# Altium PCB PCB_Ledtraitim.PcbDoc
Units mil, origin at the board's own origin, x right, y up, seen from the top; angles counter-clockwise.
Board outline 3833.96 x 3178.97 mil, 2 copper layers (Top Layer, Bottom Layer); 44 components, 43 nets, 125 pads, 12 vias.
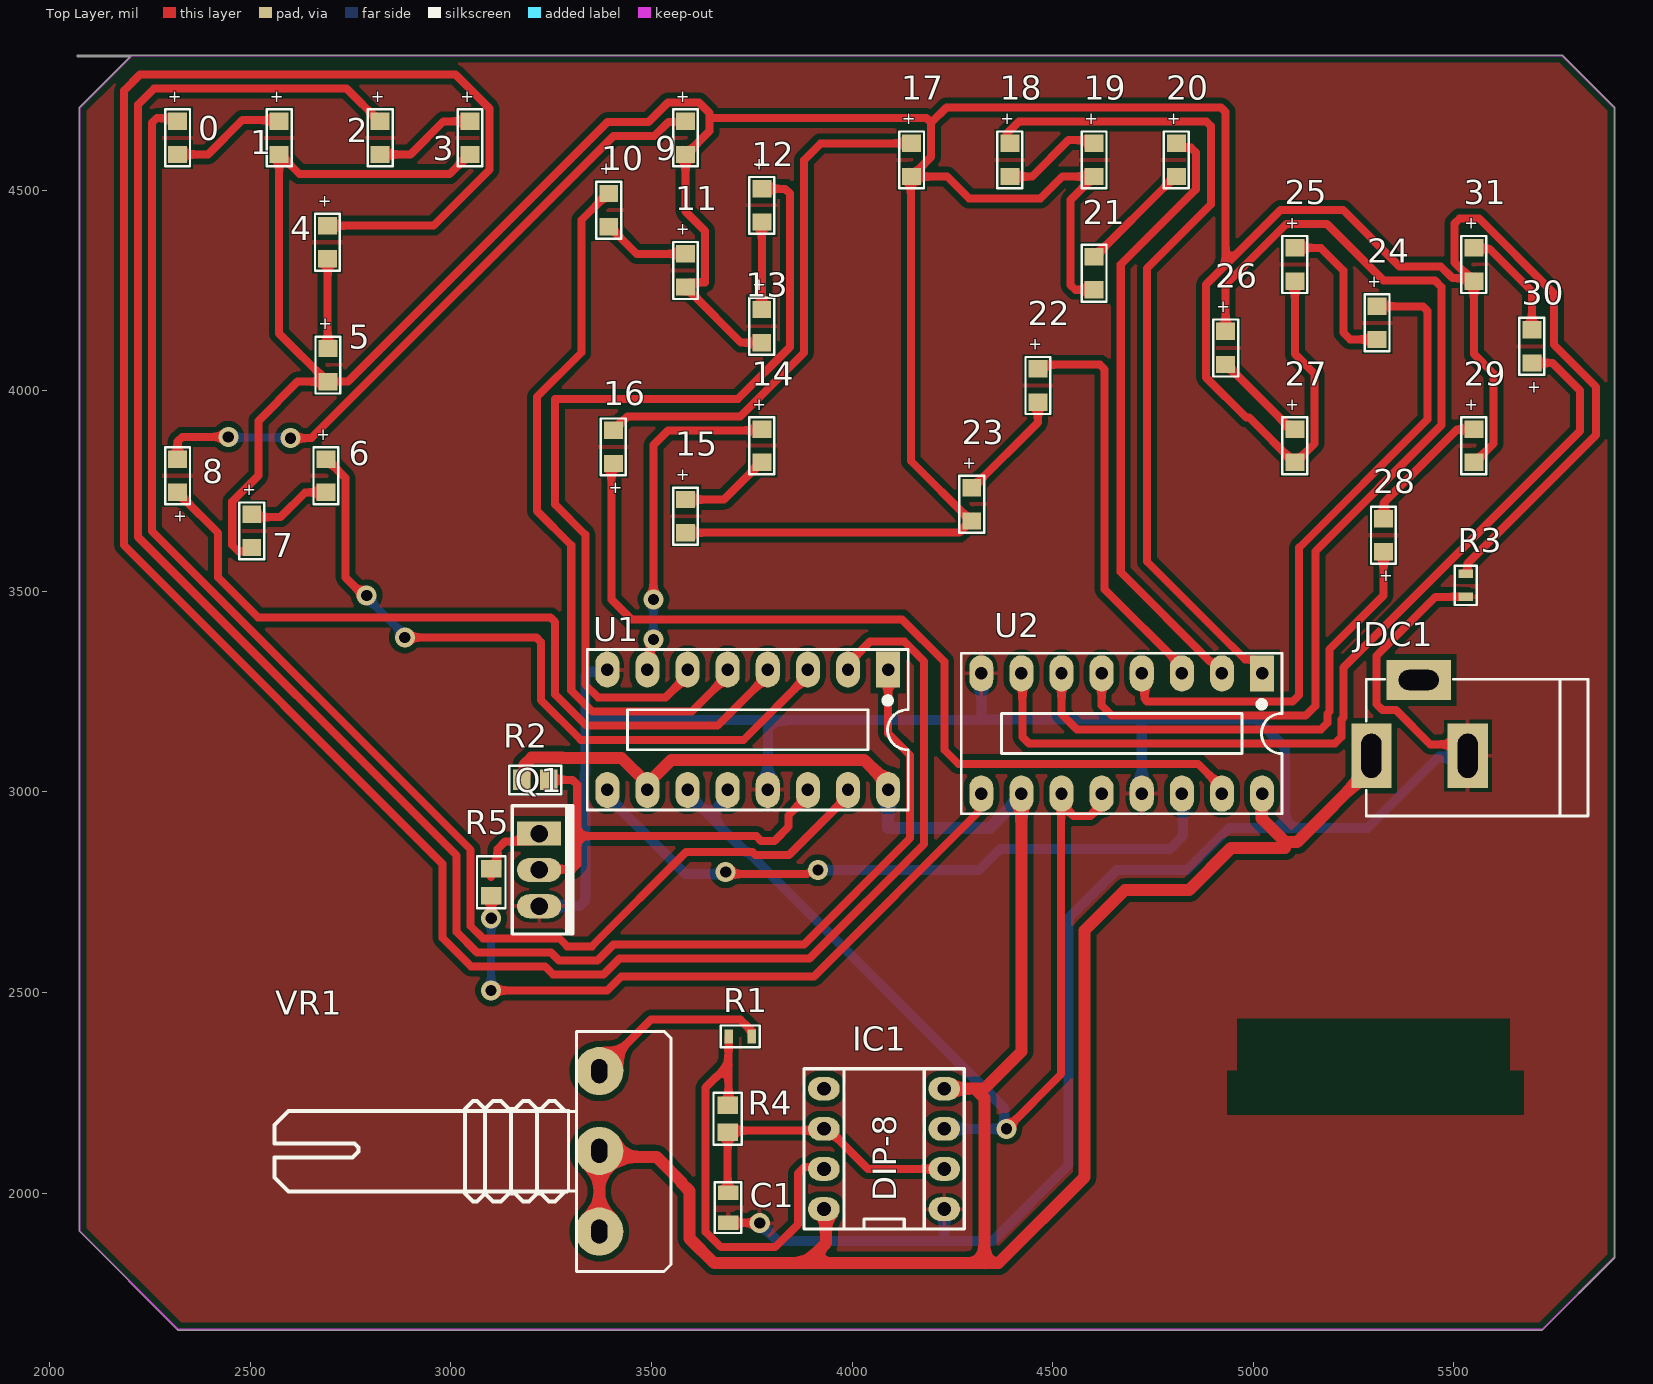
[diagram p0: Top Layer view]
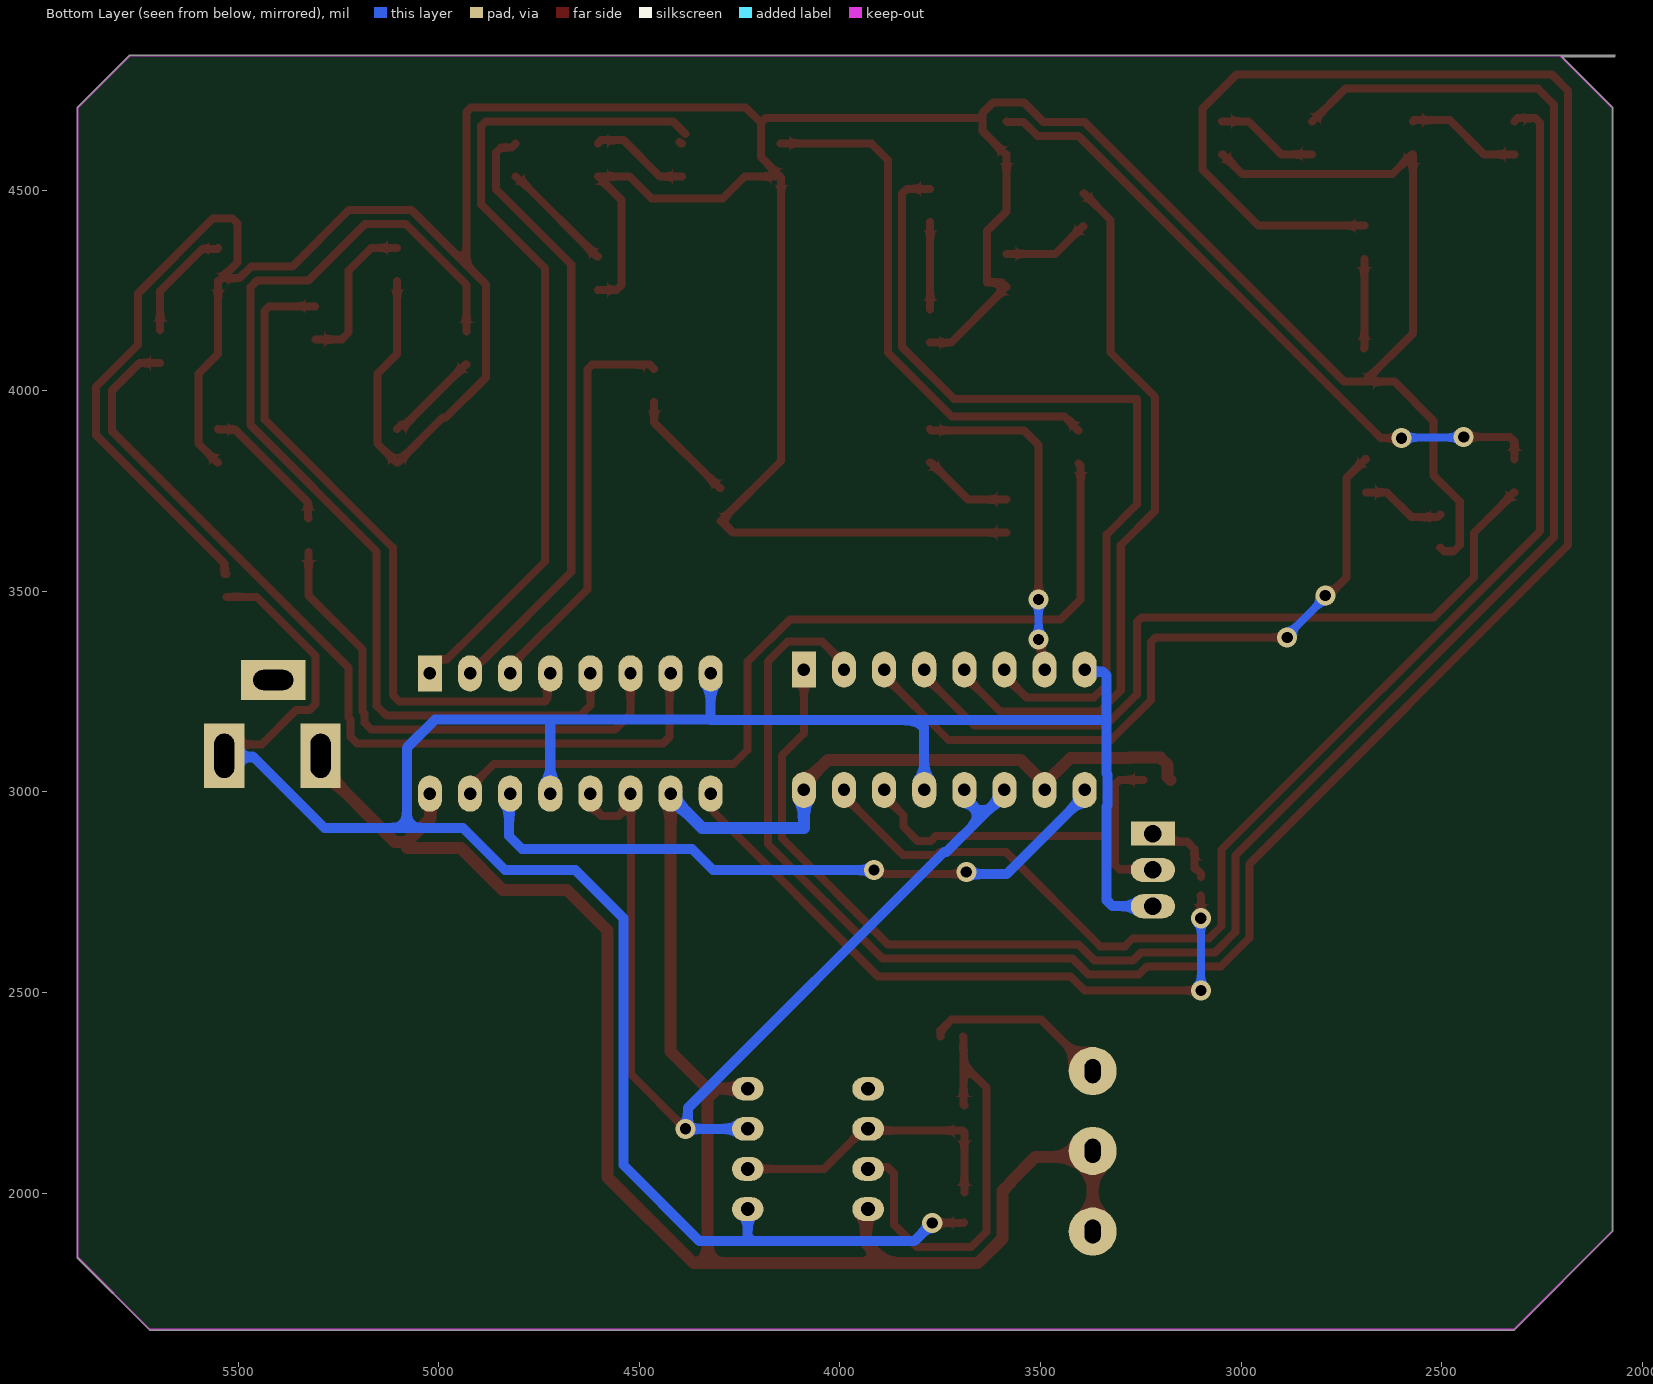
[diagram p1: Bottom Layer view, seen from below]
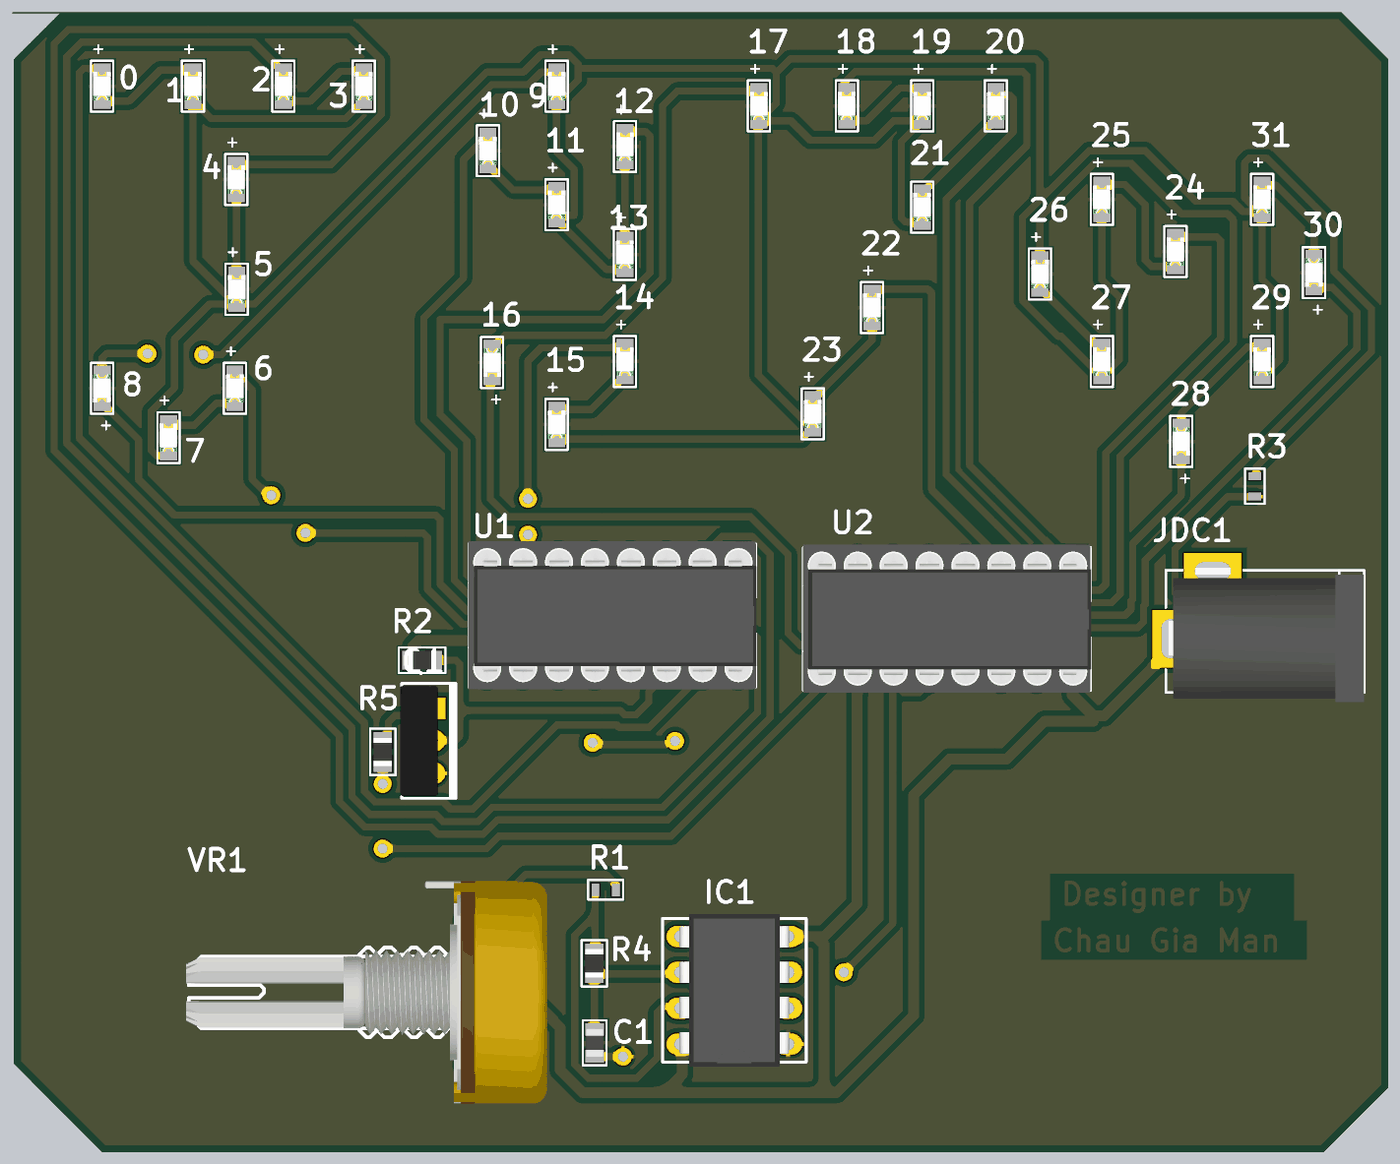
[diagram p2: 3D render of the assembled board from above, using the file's embedded part models]

## Layer stack, top to bottom
Top Solder: solder mask 0.4, Solder Resist, Dk 3.5
Top Layer: signal copper 1.4
Dielectric 1: dielectric 12.6, FR-4, Dk 4.8
Bottom Layer: signal copper 1.4
Bottom Solder: solder mask 0.4, Solder Resist, Dk 3.5

## Board outline
2073.02,1905 2073.02,4705 2073.6,4706.4 2200.21,4833.02 2070,4833.02 cw(c2070,4835) 2070,4836.98 5770,4836.98 5771.4,4836.4 5901.4,4706.4 5901.98,4705 5901.98,1840 5901.4,1838.6 5721.4,1658.6 5720,1658.02 2320,1658.02 2318.6,1658.6

## Design rules (kind name [scope] priority, off if disabled: settings)
Clearance [All] p1: gap=15 ignorepadtopadclearanceinfootprint=FALSE except(0: Arc-Hole Track-Hole SMDPad-Hole THPad-Hole Via-Hole Fill-Hole Poly-Hole Region-Hole Text-Hole)
PlaneConnect [All] p1: planeconnectstyle=Direct reliefexpansion=20 reliefentries=4 reliefconductorwidth=10 reliefairgap=10
PolygonConnect [All] p1: connectstyle=Relief reliefconductorwidth=10 reliefentries=4 polygonreliefangle="90 Angle" airgapwidth=10
RoutingVias [All] p1: holewidth=31.5 width=59.06 viastyle="Through Hole" minholewidth=31.5 minwidth=59.06 maxholewidth=31.5 maxwidth=59.06
SolderMaskExpansion [All] p1: expansion=4 istentingtop=FALSE
Width [All] p1: maxlimit=50 minlimit=20 preferedwidth=30 minimp=50.000000 maximp=50.000000 favimp=50.000000
29 further rules are at their usual default settings.

## Components (designator, comment, footprint, x,y, rotation, side; value= is the part's Value field where it differs from the comment)
0 "Red, 2V" WL-SMCW_0805 2318.46,4630.55 r90 top
1 "Red, 2V" WL-SMCW_0805 2571.74,4630.55 r90 top
2 "Red, 2V" WL-SMCW_0805 2823.52,4630.55 r90 top
3 "Red, 2V" WL-SMCW_0805 3047.59,4630.55 r90 top
4 "Red, 2V" WL-SMCW_0805 2692.25,4370.24 r90 top
5 "Red, 2V" WL-SMCW_0805 2693.46,4064.21 r90 top
6 "Red, 2V" WL-SMCW_0805 2688.46,3788.04 r90 top
7 "Red, 2V" WL-SMCW_0805 2503.46,3650.55 r90 top
8 "Red, 2V" WL-SMCW_0805 2318.46,3788.04 r270 top
9 "Red, 2V" WL-SMCW_0805 3584.89,4630.55 r90 top
10 "Red, 2V" WL-SMCW_0805 3393.46,4450.55 r90 top
11 "Red, 2V" WL-SMCW_0805 3584.89,4299.99 r90 top
12 "Red, 2V" WL-SMCW_0805 3775.23,4462.12 r90 top
13 "Red, 2V" WL-SMCW_0805 3775,4161.34 r90 top
14 "Red, 2V" WL-SMCW_0805 3775.23,3862.89 r90 top
15 "Red, 2V" WL-SMCW_0805 3584.89,3687.63 r90 top
16 "Red, 2V" WL-SMCW_0805 3405,3860 r270 top
17 "Red, 2V" WL-SMCW_0805 4148.46,4575.55 r90 top
18 "Red, 2V" WL-SMCW_0805 4393.46,4575.55 r90 top
19 "Red, 2V" WL-SMCW_0805 4603.46,4575.55 r90 top
20 "Red, 2V" WL-SMCW_0805 4808.55,4575.55 r90 top
21 "Red, 2V" WL-SMCW_0805 4603.46,4293.23 r90 top
22 "Red, 2V" WL-SMCW_0805 4463.46,4013.23 r90 top
23 "Red, 2V" WL-SMCW_0805 4298.46,3716.89 r90 top
24 "Red, 2V" WL-SMCW_0805 5309.05,4169.28 r90 top
25 "Red, 2V" WL-SMCW_0805 5104.05,4314.9 r90 top
26 "Red, 2V" WL-SMCW_0805 4931.52,4106.77 r90 top
27 "Red, 2V" WL-SMCW_0805 5104.05,3862.89 r90 top
28 "Red, 2V" WL-SMCW_0805 5325,3640 r270 top
29 "Red, 2V" WL-SMCW_0805 5550.37,3862.89 r90 top
30 "Red, 2V" WL-SMCW_0805 5694.94,4110.7 r270 top
31 "Red, 2V" WL-SMCW_0805 5550.37,4314.9 r90 top
C1 "10 uF, 25 VDC" CAP_0805 3690,1964.4 r90 top
IC1 "LM555" DIP8 4080,2110 r90 top
JDC1 "Jac DC" DC-IN 5535,3090 r180 top
Q1 "C1815" TO126 3220,2805.55 r270 top
R1 "1 KOhm, 1/4 W" resistor_0603 3721.46,2390 r0 top
R2 "1 MOhm, 1/8 W" RESISTOR_0805 3210,3030 r180 top
R3 "330 Ohm, 1/4 W" resistor_0603 5530,3515 r270 top
R4 "10 KOhm, 1/8 W" RESISTOR_0805 3690,2185 r90 top
R5 "1 MOhm, 1/8 W" RESISTOR_0805 3100.56,2774.57 r90 top
U1 "74HC595" DIP16 4090,3305 r180 top
U2 "74HC595" DIP16 5022.32,3295.56 r180 top
VR1 "10K" VOL_1 3370,2304 r270 top value="VR 10K"

## Footprints (in the part's own frame and the unit in brackets; to place one, negate y for a bottom-side part, rotate by r counter-clockwise, add the part's x,y. Pads: shape width x height; smd on the part's side, far side on the other; paste and mask are expansions set on the pad)
CAP_0805 [mm]
  rect 0.9x1.3 smd: 1(-0.975,-0.025) 2(0.925,-0.025)
  silkscreen extent -1.63,-0.86 1.57,0.81, body extent -1.03,-0.65 0.97,0.6, height 0.6
DC-IN [mil] "Jac DC input"
  rect 100x160 hole 50 slot 110.24 at 90 deg: 1(240.16,0) 2(0,0)
  rect 160x100 hole 50 slot 100 at 0 deg: 3(122.05,-188.98)
  silkscreen extent -300,-191 253,150, body extent -299,-198 245,176, height 434
DIP8 [mm] "W.300/L.400"
  oval 1.5x2 hole 0.864: 1(-3.81,-3.81) 1(1.27,-3.81) 2(-1.27,-3.81) 4(3.81,-3.81) 5(3.81,3.81) 6(1.27,3.81) 7(-1.27,3.81) 8(-3.81,3.81)
  silkscreen extent -5.08,-5.08 5.08,5.08, body extent -5.4,-3.88 5.4,3.88, height 4.5
DIP16 [mil] "16 PIN, W 300mil, Pin to pin 100mil"
  rect 60x90 hole 31: 1(0,0)
  oval 60x90 hole 31: 2(100,0) 3(200,0) 4(300,0) 5(400,0) 6(500,0) 7(600,0) 8(700,0) 9(700,300) 10(600,300) 11(500,300) 12(400,300) 13(300,300) 14(200,300) 15(100,300) 16(0,300)
  silkscreen extent -50,-50 750,350, body extent -52,-57 752,356, height 299
resistor_0603 [mm]
  rect 0.55x0.9 smd: 1(-0.725,0) 2(0.725,0)
  silkscreen extent -1.25,-0.69 1.24,0.7, body extent -0.8,-0.45 0.8,0.45, height 0.5
RESISTOR_0805 [mm] "Chip Resistor, 2-Leads, Body 2,00x1,20mm, IPC Medium Density"
  rect 1.1x1.3 smd: 1(-0.85,0) 2(0.85,0)
  silkscreen extent -1.65,-0.9 1.65,0.9, body extent -1,-0.65 1,0.65, height 0.45
TO126 [mil] "TO, Thru-Hole, Vertical, Heatsink Mounted; 3 In-Line Leads; Pitch 2.54 mm; Pin sequence 1, 3, 2"
  rect 60x110 hole 43.31: 1(-90.55,0)
  oval 60x110 hole 43.31: 2(0,0) 3(90.55,0)
  silkscreen extent -160,-67 160,85, body extent -154,-71 154,35, height 614
VOL_1 [mil]
  round 120 hole 40 slot 60 at 0 deg: 1(0,0) 2(199,0) 3(400,0)
  silkscreen extent -99,-810 500,179, body extent -110,-818 510,188, height 839
WL-SMCW_0805 [mm] "SMD Mono-color Chip LED, body 2.0x1.25mm"
  rect 1.1x1.2 smd: 1(-1.05,0) 2(1.05,0)
  silkscreen extent -1.8,-0.79 1.8,0.79, body extent -1,-0.63 1,0.62, height 0.7

## Part data
0 1 2 3 4 5 6 7 8 9 10 11 12 13 14 15 16 17 18 19 20 21 22 23 24 25 26 27 28 29 30 31: library part 160805RedBlur, "WL-SMCW SMT Mono-color Chip LED Blur, size 0805, Red, 2V, 140deg", Color=Red, ComponentLink1Description="Datasheet link", ComponentLink1URL=N/A, ComponentLink2Description="Supplier 1 URL", ComponentLink2URL=https://www.mouser.vn/ProductDetail/ams-OSRAM/LS-R976-NR-1?qs=K5ta8V%252BWhtZhvCAe1sTZFg%3D%3D, ComponentLink3Description="Supplier 2 URL", ComponentLink3URL=https://www.digikey.com/en/products/detail/lumex-opto-components-inc/SML-LXT0805IW-TR/304365, ComponentLink4Description="Supplier 3 URL", ComponentLink4URL=N/A, Size=0603, Supplier 1 Name=Mouser, Supplier 1 SN=720-LSR976-NR-1, Supplier 1 URL=https://www.mouser.vn/ProductDetail/ams-OSRAM/LS-R976-NR-1?qs=K5ta8V%252BWhtZhvCAe1sTZFg%3D%3D, Supplier 2 Name=Digi-Key, Supplier 2 SN=67-1552-2-ND, Supplier 2 URL=https://www.digikey.com/en/products/detail/lumex-opto-components-inc/SML-LXT0805IW-TR/304365, Supplier 3 Name=ICDayRoi, Supplier 3 SN=N/A, Supplier 3 URL=N/A, Type=Blur
C1: library part 0108051061025, "CAP, size 0805, 10 uF, 25 VDC", Capacitance="10 uF", Manufacture Name=TDK, Manufacture SN=CGA4J1X7S1E106K125AE, Operating Temperature="-55 to +125degC", Tolerance=+/-10%, Voltage Rating DC="25 VDC", ComponentLink2Description=Datasheet, ComponentLink2URL=https://product.tdk.com/system/files/dam/doc/product/capacitor/ceramic/mlcc/catalog/mlcc_automotive_soft_en.pdf?ref_disty=mouser, Mounting Technology=SMT, Packaging="Tape and Reel", Size=0805, Supplier 1 Name=Mouser, Supplier 1 SN=810-CGA4J1X7S1E106K2, Supplier 1 URL=https://www.mouser.vn/ProductDetail/TDK/CGA4J1X7S1E106K125AE?qs=PqoDHHvF64%252BJvhmUzM2odA%3D%3D&utm_source=mouser-refine-download&utm_medium=file&utm_campaign=CGA4J1X7S1E106K125AE&utm_content=TDK, Supplier 2 Name=Digi-Key, Supplier 2 SN=445-181411-2-ND, Supplier 2 URL=https://www.digikey.com/en/products/detail/tdk-corporation/cga4j1x7s1e106k125ae/9744777, Supplier 3 Name=thegioiic, Supplier 3 SN=OEM, Supplier 3 URL=N/A
IC1: "Timer Circuits"
JDC1: library part DCIN, "Jac DC input"
Q1: "NPN 600mW, ECB"
R1: library part 0006031021, "RES, size 0603, 1 KOhm, 1/4 W", Manufacture  Name=OEM, Rated Power="1/4 W", Resistance="1 KOhm", Resistance Tolerance=+/-1%, ComponentLink1Description="Datasheet link", ComponentLink1URL=https://www.yageo.com/upload/media/product/productsearch/datasheet/rchip/PYu-SR_20105_RoHS_L_10.pdf, ComponentLink2Description="Supplier 1 URL", ComponentLink2URL=N/A, ComponentLink3Description="Supplier 2 URL", ComponentLink3URL=https://www.digikey.com/en/products/detail/yageo/SR0603FR-7T1KL/9373103, ComponentLink4Description="Supplier 3 URL", ComponentLink4URL=N/A, Manufacture  SN=OEM, Mounting Technology=SMT, Size=0603, Supplier 1 Name=Mouser, Supplier 1 SN=71-RCS06031K00FKEA, Supplier 1 URL=https://www.mouser.vn/ProductDetail/Vishay-Dale/RCS06031K00FKEA?qs=sGAEpiMZZMvdGkrng054t9clqp6gtJJdzI9PGMrTQi4RTIuHToNahw%3D%3D, Supplier 2 Name=Digi-Key, Supplier 2 SN="YAG5829TR-ND YAG5829CT-ND YAG5829DKR-ND", Supplier 2 URL=https://www.digikey.com/en/products/detail/yageo/SR0603FR-7T1KL/9373103, Supplier 3 Name=thegioiic, Supplier 3 SN=N/A, Supplier 3 URL=N/A
R2 R5: library part 0008051055, "RES, size 0805, 1 MOhm, 1/8 W", Manufacture  Name="Vishay Dale", Manufacture  SN=CRCW08051M00JNEAC, Rated Power="1/8 W", Resistance="1 MOhm", Resistance Tolerance=+/-5%, ComponentLink1Description="Datasheet link", ComponentLink1URL=https://www.vishay.com/docs/28773/crcwce3.pdf, ComponentLink2Description="Supplier 1 URL", ComponentLink2URL=https://www.mouser.vn/ProductDetail/Vishay-Dale/CRCW08051M00JNEA?qs=1CkV0QOCgMqcQMPfmcgFvg%3D%3D, ComponentLink3Description="Supplier 2 URL", ComponentLink3URL=https://www.digikey.com/en/products/detail/vishay-dale/CRCW08051M00JNEAC/7923683, ComponentLink4Description="Supplier 3 URL", ComponentLink4URL=https://www.thegioiic.com/dien-tro-1-mohm-0805-5, Mounting Technology=SMT, Size=0805, Supplier 1 Name=Mouser, Supplier 1 SN=71-CRCW0805J-1M-E3, Supplier 1 URL=https://www.mouser.vn/ProductDetail/Vishay-Dale/CRCW08051M00JNEA?qs=1CkV0QOCgMqcQMPfmcgFvg%3D%3D, Supplier 2 Name=Digi-Key, Supplier 2 SN=541-CRCW08051M00JNEACTR-ND, Supplier 2 URL=https://www.digikey.com/en/products/detail/vishay-dale/CRCW08051M00JNEAC/7923683, Supplier 3 Name=Thegioiic, Supplier 3 SN=N/A, Supplier 3 URL=https://www.thegioiic.com/dien-tro-1-mohm-0805-5
R3: library part 0006033311, "RES, size 0603, 330 Ohm, 1/4 W", Manufacture  Name=OEM, Rated Power="1/4 W", Resistance="330 Ohm", Resistance Tolerance=+/-1%, ComponentLink1Description="Datasheet link", ComponentLink1URL=https://api.pim.na.industrial.panasonic.com/file_stream/main/fileversion/4484, ComponentLink2Description="Supplier 1 URL", ComponentLink2URL=N/A, ComponentLink3Description="Supplier 2 URL", ComponentLink3URL=https://www.digikey.com/en/products/detail/panasonic-electronic-components/ERJ-UP3F3300V/12093106, ComponentLink4Description="Supplier 3 URL", ComponentLink4URL=N/A, Manufacture  SN=OEM, Mounting Technology=SMT, Size=0603, Supplier 1 Name=Mouser, Supplier 1 SN=667-ERJ-UP3F3300V, Supplier 1 URL=https://www.mouser.vn/ProductDetail/Panasonic/ERJ-UP3F3300V?qs=sGAEpiMZZMvdGkrng054twq3eZrCFN89MDZusw5Tf7mZnfRSpxxqIA%3D%3D, Supplier 2 Name=Digi-Key, Supplier 2 SN="10-ERJ-UP3F3300VTR-ND 10-ERJ-UP3F3300VCT-ND 10-ERJ-UP3F3300VDKR-ND", Supplier 2 URL=https://www.digikey.com/en/products/detail/panasonic-electronic-components/ERJ-UP3F3300V/12093106, Supplier 3 Name=thegioiic, Supplier 3 SN=N/A, Supplier 3 URL=N/A
R4: library part 0008051035, "RES, size 0805, 10 KOhm, 1/8 W", Manufacture  Name="Vishay Dale", Manufacture  SN=CRCW080510K0JNEAC, Rated Power="1/8 W", Resistance="10 KOhm", Resistance Tolerance=+/-5%, ComponentLink1Description="Datasheet link", ComponentLink1URL=https://www.vishay.com/docs/28773/crcwce3.pdf, ComponentLink2Description="Supplier 1 URL", ComponentLink2URL=https://www.mouser.vn/ProductDetail/Vishay-Dale/CRCW080510K0JNEB?qs=LOX6nxTstiZ5fn9YUdHx5A%3D%3D, ComponentLink3Description="Supplier 2 URL", ComponentLink3URL=https://www.digikey.com/en/products/detail/vishay-dale/CRCW080510K0JNEAC/7928585, ComponentLink4Description="Supplier 3 URL", ComponentLink4URL=N/A, Mounting Technology=SMT, Size=0805, Supplier 1 Name=Mouser, Supplier 1 SN=71-CRCW080510K0JNEB, Supplier 1 URL=https://www.mouser.vn/ProductDetail/Vishay-Dale/CRCW080510K0JNEB?qs=LOX6nxTstiZ5fn9YUdHx5A%3D%3D, Supplier 2 Name=Digi-Key, Supplier 2 SN=541-4163-2-ND, Supplier 2 URL=https://www.digikey.com/en/products/detail/vishay-dale/CRCW080510K0JNEAC/7928585, Supplier 3 Name=Thegioiic, Supplier 3 SN=N/A, Supplier 3 URL=N/A
U1 U2: "8-Bit Serial-Input/Serial or Prallel-Output Shift Register with Latched 3-State Outputs", Code_JEDEC=MS-001-BB, ComponentLink1Description="Manufacturer Link", ComponentLink1URL=http://www.onsemi.com/, ComponentLink2Description=Datasheet, ComponentLink2URL=http://www.onsemi.com/pub/Collateral/MC74HC595A-D.PDF, DatasheetVersion=Mar-2000, PackageDescription="DIP; 16 Leads; Row Spacing 7.62 mm; Pitch 2.54 mm", PackageReference=648-08, PackageVersion=Apr-2000, Published=15-Apr-2002, Publisher="Altium Limited"
VR1: library part "Var Resitor", "Var Resistor"

## Via types
v1: diameter 50, hole 28, Top Layer to Bottom Layer, 12 vias

## Nets (pads, with @x,y where several pads share a name; then routed paths per layer and width w, separated by ;. In a path a pad name is that pad's centre, name@x,y a point inside that pad or via, vN(x,y) a via of type N, cw(c..) or ccw(c..) an arc to the next point about the centre after c; other vN are vias at no path point)
GND: C1.1 IC1.1@4230,1960 JDC1.2 Q1.3 R3.2 U1.8 U1.13 U2.8 U2.13 | length 6709.1
  Top Layer w20: Q1.3 Q1.3@3222.5,2712.5 ; U1.8@3387.5,3307.5 U1.8 ; C1.1 3691.5,1925.5 3769.5,1925.5 v1(3770,1925) ; U2.8@4325,3268.48 U2.8@4325,3270 ; R3.2 5455.08,3486.46 5307.95,3339.33 5307.95,3218.62 5322.6,3203.98 5356.02,3203.98 5441.62,3118.38 5506.62,3118.38 JDC1.2
  Bottom Layer w25: Q1.3 3320.36,2715 3335,2729.64 3335,2963.68 3332.5,2966.18 3332.5,3043.82 3335,3046.32 3335,3185 ; U1.8 3385,3300 3345,3300 3335,3290 3335,3185 ; v1(3770,1925) 3815,1880 4218.28,1880 ; U1.13 3790,3160 3809.03,3179.03 ; IC1.1@4230,1960 4230,1891.72 4218.28,1880 ; 4322.32,3180 4715,3180 ; U2.8 4322.32,3179.03 3809.03,3179.03 ; U2.13 4722.32,3172.68 4715,3180 ; JDC1.2 5532.14,3087.14 5462.14,3087.14 5285,2910 5080,2910 ; 3335,3185 3340.97,3179.03 3809.03,3179.03 ; 4218.28,1880 4350,1880 4540,2070 4540,2685 4660,2805 4835,2805 4940,2910 5080,2910 ; 4715,3180 5010,3180 5080,3110 5080,2910
Net0_1: 0.1 1.2 | length 290.1
  Top Layer w20: 0.1 2394.21,4589.21 2480,4675 2568.63,4675 1.2
Net0_2: 0.2 U1.15 | length 3541.3
  Top Layer w20: 0.2 2310.35,4680 2266.72,4680 2255,4668.28 2255,3650 3049.41,2855.59 3049.41,2665.23 3079.64,2635 3270,2635 3290,2615 3351.2,2615 3586.2,2850 3751.95,2850 3758.93,2843.02 3843.02,2843.02 3990,2990 U1.15
Net1_1: 1.1 3.1 5.1 7.1 9.1 11.1 13.1 15.1 17.1 19.1 21.1 23.1 25.1 27.1 29.1 31.1 R3.1 | length 11823.8
  Top Layer w20: 7.1 2494.25,3600 2470,3600 2454.84,3615.16 2454.84,3723.9 2520,3789.06 2520,3925 2617.87,4022.87 5.1@2691.5,4022.87 ; 3.1 3045.62,4589.21 2996.41,4540 2622.92,4540 2573.71,4589.21 1.1 2571.74,4142.63 5.1@2691.5,4022.87 ; 15.1 4267.24,3646.29 23.1@4296.5,3675.55 ; 13.1 3723.54,4120 3598.51,4245.03 3598.51,4247 3586.86,4258.66 11.1 3596.54,4270.31 3633.45,4270.31 3633.51,4270.37 3633.51,4398.72 3584.89,4447.35 9.1 3586.86,4589.21 3645,4647.36 3645,4680 ; 23.1 23.1@4296.5,3675.55 ; 21.1 4556.72,4251.89 4545,4263.61 4545,4475.75 4589.84,4520.59 4589.84,4522.56 19.1@4601.5,4534.21 ; 19.1 19.1@4601.5,4534.21 ; 25.1 5104.05,4091.37 5152.67,4042.75 5152.67,3868.2 5106.02,3821.55 27.1 5102.08,3821.55 4990.32,3933.31 4983.01,3933.31 4882.9,4033.42 4882.9,4265.22 4931.34,4313.66 ; R3.1 5533.93,3543.54 5534.76,3544.37 5534.76,3569.76 5855,3890 5855,4010 5750,4115 5750,4242.77 5562.77,4430 5515,4430 5501.74,4416.74 5501.74,4320.21 31.1@5540.92,4281.04 ; 29.1 5552.33,3821.55 5598.99,3868.2 5598.99,4042.75 5550.37,4091.37 31.1 5548.4,4273.56 31.1@5540.92,4281.04 ; 5.1@2691.5,4022.87 2743.38,4022.87 3390.5,4670 3492.66,4670 3541.2,4718.54 3618.86,4718.54 3645,4692.41 3645,4680 ; 3645,4680 4185.37,4680 4197.09,4668.28 ; 17.1 4237.22,4534.21 4291.43,4480 4470,4480 4524.21,4534.21 19.1@4601.5,4534.21 ; 17.1 4146.5,4532.24 4146.5,3825.55 23.1@4296.5,3675.55 ; 17.1 4150.43,4534.21 4162.09,4545.87 4162.09,4547.83 4197.09,4582.83 4197.09,4668.28 ; 4197.09,4668.28 4235.24,4706.44 4919.63,4706.44 4931.34,4694.72 4931.34,4313.66 ; 4931.34,4313.66 5068.19,4450.5 5224.5,4450.5 5365,4310 5467.78,4310 5496.74,4281.04 31.1@5540.92,4281.04
Net2_1: 2.1 3.2 | length 262.7
  Top Layer w10: 3.2@3044.48,4675 3.2
  Top Layer w20: 2.1 2899.21,4589.21 2981.89,4671.89 3.2
Net2_2: 2.2 U1.1 | length 4774.6
  Top Layer w20: 2.2 2821.55,4671.89 2739.9,4753.54 2260.26,4753.54 2220,4713.28 2220,3635.5 3014.41,2841.09 3014.41,2650.74 3065.15,2600 3249.5,2600 3269.5,2580 3365.7,2580 3405.6,2619.9 3879.9,2619.9 4145,2885 4145,3091.11 4090,3146.11 U1.1
Net4_1: 4.1 5.2 | length 223.8
  Top Layer w20: 4.1 2692.86,4328.29 2692.86,4106.16 5.2
Net4_2: 4.2 U1.2 | length 6094.9
  Top Layer w20: 4.2 2956.57,4411.57 3096.22,4551.22 3096.22,4703.9 3011.57,4788.54 2225.26,4788.54 2185,4748.28 2185,3615 2979.41,2820.59 2979.41,2636.24 3050.65,2565 3235,2565 3255,2545 3380.19,2545 3420.1,2584.9 3869.9,2584.9 3894.4,2584.9 4180,2870.5 4180,2895 4180,3325.36 4130.36,3375 4045,3375 3990,3320 U1.2
Net6_1: 6.1 7.2 | length 213.4
  Top Layer w20: 7.2 2510.35,3685 2575,3685 2636.7,3746.7 6.1
Net6_2: 6.2 U1.3 | length 1835.6
  Top Layer w20: 6.2@2689.56,3828.28 6.2 2690.43,3829.38 2737.09,3782.73 2737.09,3534.8 2781.88,3490 v1(2790,3490) ; v1(2885,3385) 3213.28,3385 3225,3373.28 3225,3228.73 3323.73,3130 3730,3130 3890,3290 U1.3 U1.3@3890,3330.82
  Bottom Layer w20: v1(2790,3490) 2790,3485 2885,3390 v1(2885,3385)
Net8_1: 8.1 9.2 | length 1643.6
  Top Layer w20: 8.1 2318.46,3873.28 2330.18,3885 v1(2445,3885) ; v1(2600.11,3881.99) 2651.99,3881.99 3405,4635 3507.16,4635 3542.16,4670 3583,4670 9.2
  Bottom Layer w20: v1(2445,3885) 2446.5,3883.5 2598.61,3883.5 v1(2600.11,3881.99)
Net8_2: 8.2 U1.4 | length 1950.7
  Top Layer w20: 8.2 2320.43,3746.7 2332.09,3735.05 2332.09,3733.08 2419.84,3645.32 2419.84,3534.65 2519.5,3435 3248.28,3435 3260,3423.28 3260,3243.22 3338.22,3165 3665,3165 3790,3290 U1.4
Net10_1: 10.1 11.2 | length 219.5
  Top Layer w20: 10.1 3395.43,4409.21 3463.31,4341.33 11.2
Net10_2: 10.2 U1.5 | length 1813.6
  Top Layer w20: 10.2 3391.5,4491.89 3325,4425.39 3325,4095 3215,3985 3215,3700 3300,3615 3300,3252.72 3352.72,3200 3600,3200 3690,3290 U1.5
Net12_1: 12.1 13.2 | length 218.2
  Top Layer w20: 13.2@3775.23,4202.68 3775.11,4202.79 3775.11,4420.67 12.1
Net12_2: 12.2 U1.6 | length 2145.9
  Top Layer w20: U1.6 3590,3290 3535,3235 3367.22,3235 3335,3267.22 3335,3641.21 3260,3716.21 3260,3980 3260.44,3979.56 3715.19,3979.56 3845,4109.37 3845,4491.75 3833.28,4503.46 12.2
Net14_1: 14.1 15.2 | length 228.7
  Top Layer w20: 15.2 3680.68,3728.97 3773.26,3821.55 14.1
Net14_2: 14.2 U1.7 | length 852.7
  Top Layer w20: U1.7 3497.65,3312.65 3497.65,3364.54 3505,3371.88 v1(3505,3380) ; v1(3505,3480) 3505,3865 3541.24,3901.24 3772.24,3901.24 14.2
  Bottom Layer w20: v1(3505,3380) v1(3505,3480)
Net16_1: 16.1 17.2 | length 1322.3
  Top Layer w20: 16.1 3406.97,3901.34 3418.62,3912.99 3418.62,3914.96 3439.9,3936.24 3721.36,3936.24 3880,4094.87 3880,4575 3921.89,4616.89 17.2
Net16_2: 16.2 U2.15 | length 2216.3
  Top Layer w20: 16.2 3400,3813.66 3400,3480 3450,3430 4124.85,3430 4230,3324.85 4230,3105 4265,3070 4862.87,3070 4922.32,3010.56 U2.15 ; U2.15@4925,2970 U2.15@4925,2985
Net18_1: 18.1 19.2 | length 251
  Top Layer w20: 18.1 4449.21,4534.21 4540,4625 4595.35,4625 19.2
Net18_2: 18.2 U2.1 | length 2110.2
  Top Layer w20: 4385,4640 4416.44,4671.44 4883.28,4671.44 4895,4659.72 4895,4465 4735,4305 4735,3575 4944.44,3365.56 4945.1,3365.56 4980.1,3330.56 5002.32,3330.56 5025,3307.87 U2.1@5025,3285 ; 18.2 4396.89,4616.89 18.2@4400,4620
Net20_1: 20.1 21.2 | length 287.8
  Top Layer w20: 21.2 4605.43,4334.57 4793.43,4522.56 4796.89,4522.56 20.1
Net20_2: 20.2 U2.2 | length 1541.3
  Top Layer w20: 20.2 4819.34,4606.09 4845.45,4606.09 4857.17,4594.38 4857.17,4502.2 4670,4315.03 4670,3547.87 4892.39,3325.48 4896.57,3325.48 4922.32,3299.73 U2.2
Net22_1: 22.1 23.2 | length 283.2
  Top Layer w20: 23.2 4300.43,3758.23 4463.46,3921.26 22.1
Net22_2: 22.2 U2.3 | length 1013.1
  Top Layer w20: 22.2 4473.9,4065 4618.28,4065 4630,4053.28 4630,3505 4822.32,3312.68 U2.3
Net24_1: 24.1 25.2 | length 390.4
  Top Layer w10: 24.1@5307.08,4127.95 24.1
  Top Layer w20: 25.2 5168.76,4356.24 5224.79,4300.21 5224.79,4145.21 5242.05,4127.95 24.1@5307.08,4127.95
Net24_2: 24.2 U2.4 | length 1655.4
  Top Layer w20: U2.4@4725,3270 4729.97,3265.03 4729.97,3231.15 4735.56,3225.56 5098.68,3225.56 5114.84,3241.72 5114.84,3608.84 5435,3928.99 5435,4198.91 5423.28,4210.62 24.2
Net26_1: 26.1 27.2 | length 239.3
  Top Layer w20: 26.1 4933.49,4065.43 5083.04,3915.88 5092.4,3915.88 27.2
Net26_2: 26.2 U2.5 | length 2565
  Top Layer w20: U2.5@4625,3270 4625,3264.76 4622.32,3262.08 4622.32,3215.93 4647.69,3190.56 5131.05,3190.56 5155,3214.51 5155,3599.5 5470,3914.5 5470,4258.28 5453.28,4275 5325,4275 5184.5,4415.5 5082.68,4415.5 4931.52,4264.34 26.2
Net28_1: 28.1 29.2 | length 340.3
  Top Layer w20: 28.1 5326.28,3682.61 5326.28,3721.28 5508.46,3903.46 5549.6,3903.46 29.2
Net28_2: 28.2 U2.6 | length 1247.3
  Top Layer w20: U2.6@4525,3270 4525,3264.76 4522.32,3262.08 4522.32,3193.91 4560.67,3155.56 5168.68,3155.56 5184.84,3171.72 5184.84,3194.85 5190,3200.01 5190,3355 5325,3490 28.2
Net30_1: 30.1 31.2 | length 285.6
  Top Layer w20: 31.2 5552.47,4354.14 5589.14,4354.14 5694.94,4248.34 30.1
Net30_2: 30.2 U2.7 | length 2200.4
  Top Layer w20: U2.7@4425,3270 4425,3136.72 4441.16,3120.56 5203.68,3120.56 5219.84,3136.72 5219.84,3180.36 5225,3185.51 5225,3310 5815,3900 5815,4000.5 5746.14,4069.37 30.2
NetC1_2: C1.2 IC1.2 IC1.6 R4.1 | length 734.7
  Top Layer w20: C1.2@3690,2001.81 R4.1 3694.23,2155.77 3925.77,2155.77 IC1.6 3939.84,2160 4039.84,2060 IC1.2
NetIC1_3: IC1.1@4230,2160 U1.11 U1.12 U2.11 U2.12 | length 2479.9
  Top Layer w20: U1.11@3590,2992.5 U1.11 ; U1.12@3690,2987.5 U1.12 ; v1(4385,2160) 4521.31,2296.31 U2.11@4521.31,2969.73 ; U2.11 4522.32,2969.73 4552.05,2940 4594.59,2940 4614.66,2960.07 4614.66,2987.9 U2.12
  Bottom Layer w25: U1.11 3590,2995 3645,2940 ; U1.12 3690,2985 3645,2940 ; IC1.1@4230,2160 v1@4375,2160 ; v1(4385,2160) 4379.26,2165.74 4379.26,2211.45 3740.71,2850 3735,2850 3645,2940
NetIC1_7: IC1.7 R1.1 R4.2 | length 1083
  Top Layer w20: R4.2 3692.09,2220.55 3692.09,2320 ; R1.1 3692.09,2389.17 3692.09,2320 ; IC1.7 3925,2065 3881.72,2065 3865,2048.28 3865,1921.72 3808.28,1865 3673.34,1865 3635,1903.34 3635,2262.91 3692.09,2320
NetQ1_1: Q1.1 R5.2 | length 198
  Top Layer w20: R5.2@3100,2787.76 3100,2796.38 3111.65,2808.04 3115,2808.04 3116.15,2809.19 3116.15,2857.14 3135.12,2876.1 3200,2876.1 Q1.1
NetQ1_2: Q1.2 R2.1 U1.14 | length 1039.6
  Top Layer w20: Q1.2@3215,2805 3217.12,2807.12 3303.28,2807.12 3315,2818.84 3315,2890 ; R2.1 3303.28,3030 3315,3018.28 3315,2890 ; U1.14 3890,2990 3841.75,2941.75 3841.75,2913.2 3806.57,2878.02 3773.43,2878.02 3761.45,2890 3315,2890
NetR1_2: R1.2 VR1.1 | length 459.3
  Top Layer w20: VR1.1 3498.72,2432.72 3667.72,2432.72 3721.43,2432.72 3750,2404.14 R1.2
NetR5_1: R5.1 U2.9 | length 1676.4
  Top Layer w20: v1(3100,2505) 3389.69,2505 3424.69,2540 3905,2540 4314.66,2949.66 4314.66,2962.08 4322.58,2970 U2.9@4325,2970 ; v1@3100,2700 3100.36,2699.64 v1(3100.36,2685) 3100.46,2685.1 3100.46,2741.01 R5.1
  Bottom Layer w20: v1(3100,2505) 3100.18,2505.18 3100.18,2684.82 v1(3100.36,2685)
NetU1_9: U1.9 U2.14 | length 1669.3
  Top Layer w20: U1.9@3390,2990 U1.9 ; v1(3685,2800) 3690,2795 3888.28,2795 3892.54,2799.26 3909.26,2799.26 v1(3915,2805)
  Bottom Layer w25: U1.9 3390,2990 3585,2795 3680,2795 v1(3685,2800) ; v1(3915,2805) 4316.56,2805 4369.06,2857.5 4792.5,2857.5 4825,2890 U2.14@4825,2970
VCC: IC1.4 IC1.8 JDC1.1 R2.2 U1.10 U1.16 U2.10 U2.16 VR1.2 VR1.3 | length 6326.6
  Top Layer w30: R2.2 3183.19,3036.65 3183.19,3067.43 3201.35,3085.59 3277.54,3085.59 3278.14,3085 3425,3085 U1.10@3490,3020 ; VR1.3 VR1.2 3385,2090 3512.43,2090 3575.46,2026.97 3575.46,2024.4 3595,2004.85 3595,1886.77 3656.77,1825 3885,1825 ; U1.10 U1.10@3490,3020 ; IC1.8 3935,1955 3935,1875 3885,1825 ; U1.16 4090,3020 4030,3080 3550,3080 U1.10@3490,3020 ; IC1.4 4330,2260 4422.32,2352.32 U2.10 ; 4312.43,2254.44 4330,2236.87 4330,1825 ; U2.16@5022.97,2972.03 5021.41,2970.47 5021.41,2933.59 5080.04,2874.96 5109.81,2874.96 5294.84,3060 JDC1.1 ; 5080.04,2860 4945,2860 4840,2755 4680,2755 4580,2655 4580,2040 4365,1825 4330,1825 ; 3885,1825 4330,1825
  Bottom Layer w30: U1.16 4090,2910 4343.64,2910 4422.32,2988.68 U2.10
pads on no net: IC1.5 JDC1.3

## Polygon pours and split planes (outlines as drawn)
GND on Top Layer "GND_L01_P001" (solid, pour order 1): 2073.02,1905 2073.02,4705 2073.6,4706.4 2200.21,4833.02 2070,4833.02 cw(c2070,4835) 2070,4836.98 5770,4836.98 5771.4,4836.4 5901.4,4706.4 5901.98,4705 5901.98,1840 5901.4,1838.6 5721.4,1658.6 5720,1658.02 2320,1658.02 2318.6,1658.6

## Keep-outs
Keep-Out Layer:
  lines w3.94: 2070,4835 5770,4835 5900,4705 5900,1840 5720,1660 2320,1660 2075,1905 2075,4705 2205,4835

## Other copper
Multi-Layer:
  text "Designer by" at 4985,2349.99 h60
  text "Chau Gia Man" at 4960,2220 h60

## Text inside footprints (layer, text, board x,y; h text height)
0: Top Overlay "+" at 2329.46,4745.55 h30 r180
1: Top Overlay "+" at 2582.74,4745.55 h30 r180
2: Top Overlay "+" at 2834.52,4745.55 h30 r180
3: Top Overlay "+" at 3058.59,4745.55 h30 r180
4: Top Overlay "+" at 2703.25,4485.24 h30 r180
5: Top Overlay "+" at 2704.46,4179.21 h30 r180
6: Top Overlay "+" at 2699.46,3903.04 h30 r180
7: Top Overlay "+" at 2514.46,3765.55 h30 r180
8: Top Overlay "+" at 2307.46,3673.04 h30
9: Top Overlay "+" at 3595.89,4745.55 h30 r180
10: Top Overlay "+" at 3404.46,4565.55 h30 r180
11: Top Overlay "+" at 3595.89,4414.99 h30 r180
12: Top Overlay "+" at 3786.23,4577.12 h30 r180
13: Top Overlay "+" at 3786,4276.34 h30 r180
14: Top Overlay "+" at 3786.23,3977.89 h30 r180
15: Top Overlay "+" at 3595.89,3802.63 h30 r180
16: Top Overlay "+" at 3394,3745 h30
17: Top Overlay "+" at 4159.46,4690.55 h30 r180
18: Top Overlay "+" at 4404.46,4690.55 h30 r180
19: Top Overlay "+" at 4614.46,4690.55 h30 r180
20: Top Overlay "+" at 4819.55,4690.55 h30 r180
22: Top Overlay "+" at 4474.46,4128.23 h30 r180
23: Top Overlay "+" at 4309.46,3831.89 h30 r180
24: Top Overlay "+" at 5320.05,4284.28 h30 r180
25: Top Overlay "+" at 5115.05,4429.9 h30 r180
26: Top Overlay "+" at 4942.52,4221.77 h30 r180
27: Top Overlay "+" at 5115.05,3977.89 h30 r180
28: Top Overlay "+" at 5314,3525 h30
29: Top Overlay "+" at 5561.37,3977.89 h30 r180
30: Top Overlay "+" at 5683.94,3995.7 h30
31: Top Overlay "+" at 5561.37,4429.9 h30 r180
IC1: Top Overlay "DIP-8" at 4110,1980 h59.05 r90